# EAGLE board FH9PHI2ICD7FAOS (EAGLE 9.6.2)
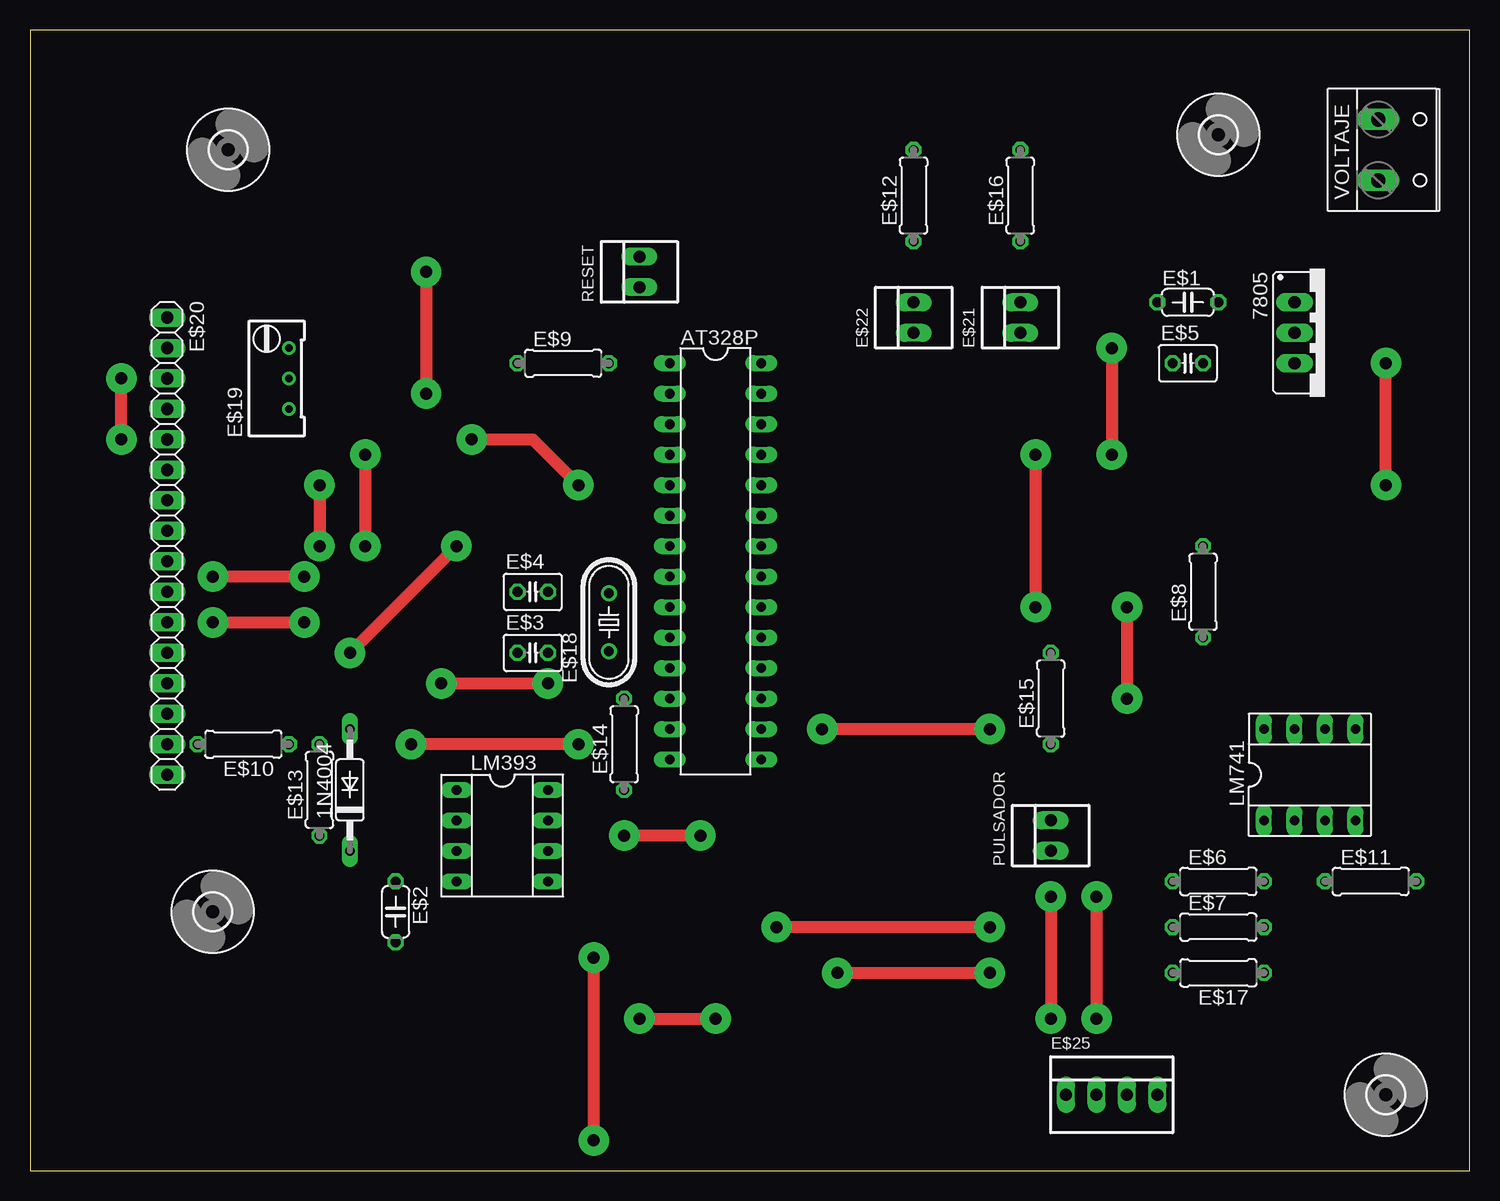
[diagram p0: board, top side]
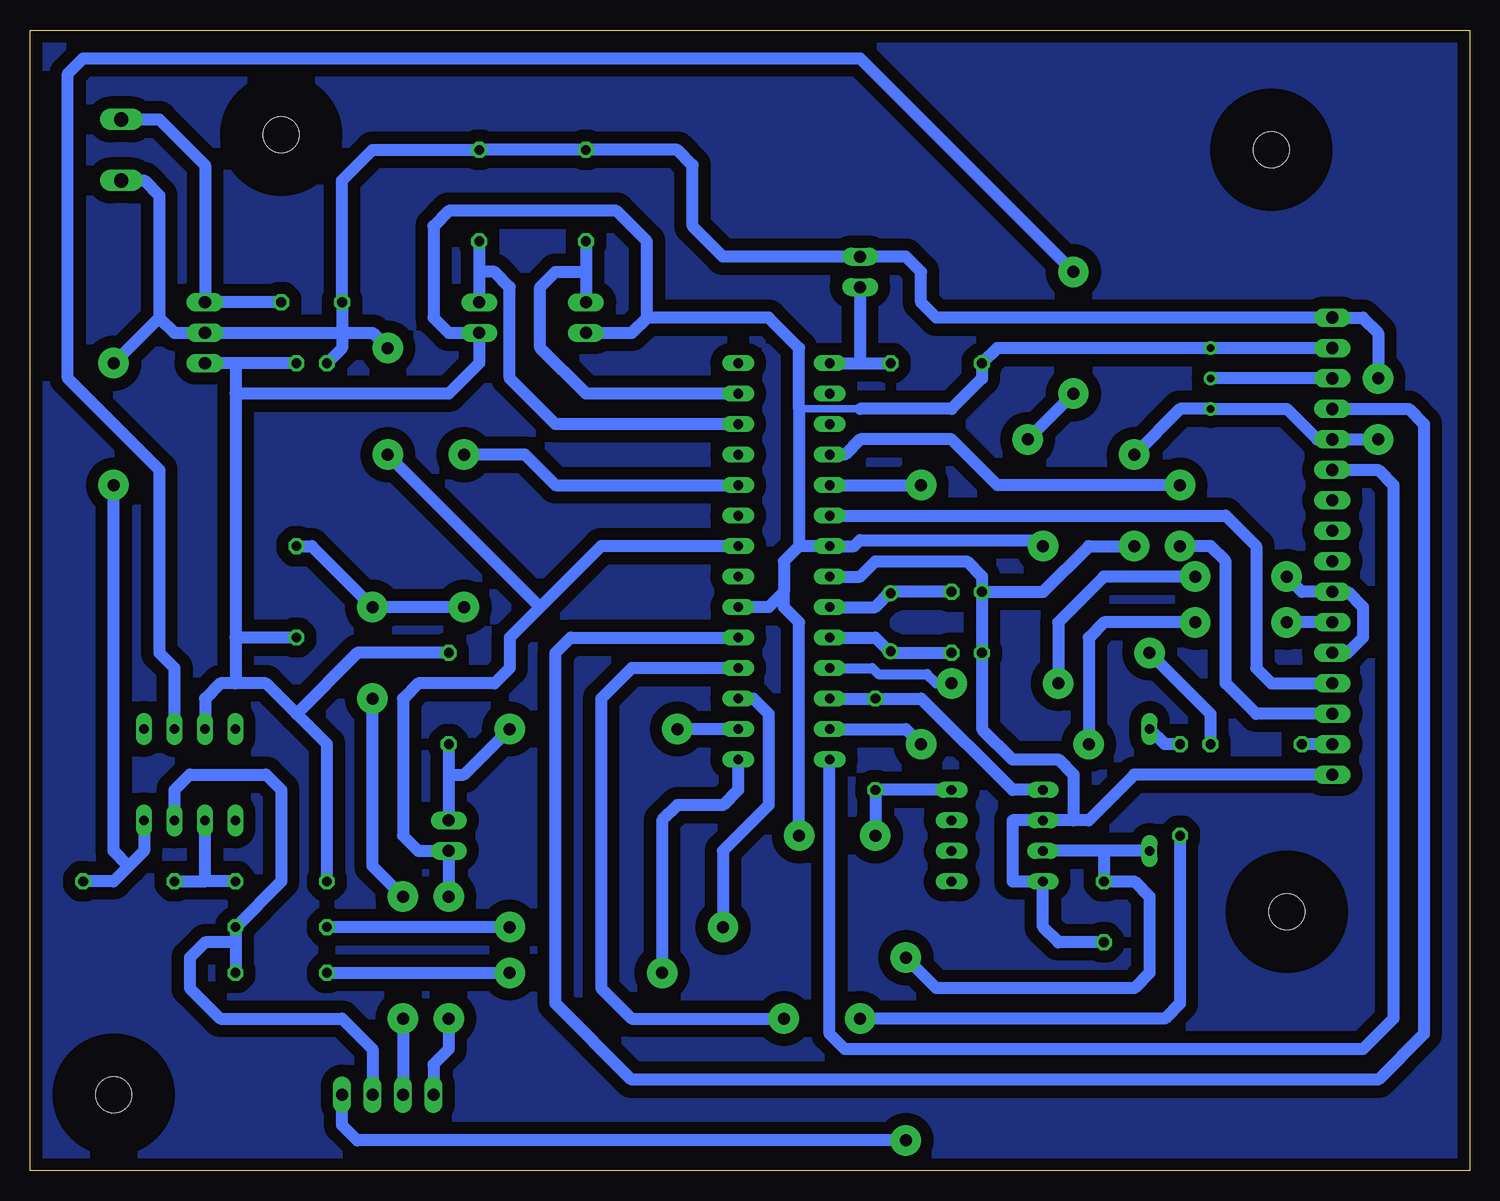
[diagram p1: board, bottom side, seen from below]

Size 120 x 95.08 mm. Coordinates in mm from the lower left corner, seen from the top.
Outline: 0,0 120,0 120,95.08 0,95.08 0,0
Copper layers (1*16): Top 0.035mm / dielectric 1.5mm / Bottom 0.035mm
Design rules "default": minimum track width 10mil, minimum drill 24mil, track to track 8mil, track to pad 8mil, pad to pad 8mil, via to via 8mil, smd to smd 8mil, copper to edge 40mil, drill to drill 8mil, minimum pad ring 10mil, minimum via ring 8mil, stop-mask expansion 4mil, vias tented up to drill 0mil, thermal gap 10mil

## Footprints (pad centres in the part's own frame; a part is rotated, then mirrored left to right if it is on the bottom)
C2992 = drill 0.813 long: A 5.08,0; C -5.08,0
78XXS = drill 1.016 long: GND 0,-2.54; IN -2.54,-2.54; OUT 2.54,-2.54
DIL28-3 = drill 0.813 long: 1 -16.51,-3.81; 2 -13.97,-3.81; 3 -11.43,-3.81; 4 -8.89,-3.81; 5 -6.35,-3.81; 6 -3.81,-3.81; 7 -1.27,-3.81; 8 1.27,-3.81; 9 3.81,-3.81; 10 6.35,-3.81; 11 8.89,-3.81; 12 11.43,-3.81; 13 13.97,-3.81; 14 16.51,-3.81; 15 16.51,3.81; 16 13.97,3.81; 17 11.43,3.81; 18 8.89,3.81; 19 6.35,3.81; 20 3.81,3.81; 21 1.27,3.81; 22 -1.27,3.81; 23 -3.81,3.81; 24 -6.35,3.81; 25 -8.89,3.81; 26 -11.43,3.81; 27 -13.97,3.81; 28 -16.51,3.81
C050-024X044 = drill 0.813 octagon: 1 -2.54,0; 2 2.54,0
C025-030X050 = drill 0.813 octagon: 1 -1.27,0; 2 1.27,0
0207/7 = drill 0.813 octagon: 1 -3.81,0; 2 3.81,0
HC49/S = drill 0.813: 1 -2.413,0; 2 2.413,0
RTRIM64W = drill 0.61: 1 1.27,-2.54; 2 1.27,0; 3 1.27,2.54
1X16 = drill 1.016 long: 1 -19.05,0; 2 -16.51,0; 3 -13.97,0; 4 -11.43,0; 5 -8.89,0; 6 -6.35,0; 7 -3.81,0; 8 -1.27,0; 9 1.27,0; 10 3.81,0; 11 6.35,0; 12 8.89,0; 13 11.43,0; 14 13.97,0; 15 16.51,0; 16 19.05,0
22-23-2021 = drill 1 long: 1 -1.27,0; 2 1.27,0
3,0 = hole 3: 0,0
22-23-2041 = drill 1 long: 1 -3.81,0; 2 -1.27,0; 3 1.27,0; 4 3.81,0
SOCKET-08 = drill 0.813 long: 1 -3.81,-3.81; 2 -1.27,-3.81; 3 1.27,-3.81; 4 3.81,-3.81; 5 3.81,3.81; 6 1.27,3.81; 7 -1.27,3.81; 8 -3.81,3.81
W237-132 = drill 1.194 long: 1 -2.54,-0.635; 2 2.54,-0.635

## Placement (x,y rotation side)
1N4004  [C2992]  26.67,31.75 90 top
7805  [78XXS]  107.95,69.85 270 top
AT328P  [DIL28-3]  57.15,50.8 270 top
E$1  0.33uF  [C050-024X044]  96.52,72.39 0 top
E$2  1uF  [C050-024X044]  30.48,21.59 270 top
E$3  22pF  [C025-030X050]  41.91,43.18 0 top
E$4  22pF  [C025-030X050]  41.91,48.26 0 top
E$5  100nF  [C025-030X050]  96.52,67.31 0 top
E$6  10k  [0207/7]  99.06,24.13 0 top
E$7  1M  [0207/7]  99.06,20.32 0 top
E$8  10k  [0207/7]  97.79,48.26 90 top
E$9  10k  [0207/7]  44.45,67.31 0 top
E$10  220  [0207/7]  17.78,35.56 180 top
E$11  10k  [0207/7]  111.76,24.13 0 top
E$12  10k  [0207/7]  73.66,81.28 90 top
E$13  150  [0207/7]  24.13,31.75 90 top
E$14  330  [0207/7]  49.53,35.56 90 top
E$15  10k  [0207/7]  85.09,39.37 90 top
E$16  10k  [0207/7]  82.55,81.28 90 top
E$17  220  [0207/7]  99.06,16.51 180 top
E$18  16Mhz  [HC49/S]  48.26,45.72 90 top
E$19  10k  [RTRIM64W]  20.32,66.04 0 top
E$20  [1X16]  11.43,52.07 270 top
E$21  [22-23-2021]  82.55,71.12 90 top
E$22  [22-23-2021]  73.66,71.12 90 top
E$23  [3,0]  15.24,21.59 0 top
E$24  [3,0]  16.51,85.09 0 top
E$25  [22-23-2041]  90.17,6.35 0 top
E$26  [3,0]  113.03,6.35 0 top
E$27  [3,0]  99.06,86.36 0 top
LM393  [SOCKET-08]  39.37,27.94 270 top
LM741  [SOCKET-08]  106.68,33.02 0 top
PULSADOR  [22-23-2021]  85.09,27.94 90 top
RESET  [22-23-2021]  50.8,74.93 90 top
VOLTAJE  [W237-132]  113.03,85.09 270 top

## Library data of the parts
1N4004 = diode
7805 = v-reg
AT328P = 40xx
E$1-E$17 E$19 = rcl
E$18 = crystal
E$20 = pinhead
E$21 E$22 E$25 PULSADOR RESET = con-molex
E$23 E$24 E$26 E$27 = holes
LM393 LM741 = ic-package
VOLTAJE = con-wago-508

## Nets
S$1: AT328P.10 E$3.2
S$2: AT328P.9 E$4.2
S$4: AT328P.1 E$9.2 RESET.1
S$5: AT328P.11 E$20.12
S$6: 1N4004.C E$2.1 E$25.4 LM393.3
S$7: AT328P.18 E$13.1
S$8: AT328P.12 LM393.1
S$9: 1N4004.A E$13.2
S$10: AT328P.16 E$15.1 PULSADOR.2
S$11: E$19.2 E$20.3
S$12: AT328P.19 E$20.4
S$13: E$10.2 E$20.15
S$14: AT328P.14 E$20.6
S$15: AT328P.6 E$20.13
S$16: AT328P.4 E$20.14
S$17: E$6.2 E$11.1 LM741.2
S$18: AT328P.24 E$8.2 E$25.2
S$19: AT328P.13 E$20.11
S$20: E$17.1 E$25.3 LM741.3
S$21: AT328P.27 E$12.1 E$22.2
S$22: AT328P.8 E$2.2 E$3.1 E$4.1 E$20.16 LM393.2 LM393.4
S$23: AT328P.26 E$16.1 E$21.2
S$24: 7805.OUT AT328P.7 AT328P.20 E$5.2 E$6.1 E$8.1 E$9.1 E$14.1 E$15.2 E$19.3 E$20.2 E$21.1 E$22.1 LM393.8 LM741.7
S$26: 7805.GND AT328P.22 E$1.1 E$5.1 E$11.2 E$12.2 E$16.2 E$19.1 E$20.1 E$20.5 E$25.1 LM741.4 PULSADOR.1 RESET.2
S$27: E$10.1
S$28: AT328P.15 E$17.2
S$29: AT328P.5 LM741.6
S$31: AT328P.17 E$7.1
S$34: 7805.IN E$1.2

## Tracks (layer width: path | path; a pad name or v marks a point on that pad's centre or on a via)
S$1
  Bottom 1.016: AT328P.10 49.53,44.45 48.26,43.18 E$3.2
S$2
  Bottom 1.016: AT328P.9 49.53,46.99 48.26,48.26 E$4.2
S$3
  pour Bottom (isolate 1.016): 0,95.25 120.65,95.25 120.65,0 0,0
S$4
  Bottom 1.016: AT328P.1 50.8,67.31 | 50.8,67.31 E$9.2 | RESET.1 50.8,67.31
S$5  (via drill 1 pad 2.54)
  Top 1.016: v22.86,49.53 v15.24,49.53 | v34.29,40.64 v43.18,40.64
  Bottom 0.813: AT328P.11 49.78,41.91 49.28,41.4 45.21,41.4 44.45,40.64 v43.18,40.64
  Bottom 1.016: v22.86,49.53 30.48,49.53 34.29,45.72 v34.29,40.64 | v15.24,49.53 13.97,48.26 10.16,48.26 8.89,46.99 8.89,44.45 10.16,43.18 E$20.12
S$6  (via drill 1 pad 2.54)
  Top 1.016: v46.99,17.78 v46.99,2.54
  Bottom 1.016: 1N4004.C 30.48,26.67 | 30.48,26.67 LM393.3 | 30.48,26.67 E$2.1 27.94,24.13 26.67,22.86 26.67,16.51 27.94,15.24 44.45,15.24 v46.99,17.78 | v46.99,2.54 92.71,2.54 93.98,3.81 E$25.4
S$7  (via drill 1 pad 2.54)
  Top 1.016: v50.8,12.7 v57.15,12.7
  Bottom 1.016: AT328P.18 69.85,41.91 72.39,39.37 72.39,15.24 69.85,12.7 v57.15,12.7 | v50.8,12.7 25.4,12.7 24.13,13.97 E$13.1
S$8
  Bottom 1.016: LM393.1 38.1,31.75 45.72,39.37 AT328P.12
S$9
  Bottom 1.016: E$13.2 25.4,35.56 1N4004.A
S$10  (via drill 1 pad 2.54)
  Top 1.016: v80.01,36.83 v66.04,36.83
  Bottom 1.016: E$15.1 85.09,33.02 | 85.09,33.02 PULSADOR.2 | 85.09,33.02 83.82,33.02 v80.01,36.83 | AT328P.16 v66.04,36.83
S$11
  Bottom 1.016: E$20.3 E$19.2
S$12
  Bottom 1.016: E$20.4 5.08,63.5 3.81,62.23 3.81,11.43 7.62,7.62 69.85,7.62 76.2,13.97 76.2,43.18 74.93,44.45 AT328P.19
S$13
  Bottom 1.016: E$20.15 E$10.2
S$14
  Bottom 1.016: E$20.6 7.62,58.42 6.35,57.15 6.35,12.7 8.89,10.16 52.07,10.16 53.34,11.43 AT328P.14
S$15
  Bottom 1.016: AT328P.6 20.32,54.61 17.78,52.07 17.78,41.91 16.51,40.64 E$20.13
S$16  (via drill 1 pad 2.54)
  Top 1.016: v24.13,57.15 v24.13,52.07
  Bottom 1.016: AT328P.4 52.07,59.69 50.8,60.96 43.18,60.96 39.37,57.15 v24.13,57.15 | v24.13,52.07 21.59,52.07 20.32,50.8 20.32,40.64 17.78,38.1 E$20.14
S$17
  Bottom 1.016: E$6.2 105.41,24.13 | 105.41,24.13 LM741.2 | E$11.1 105.41,24.13
S$18  (via drill 1 pad 2.54)
  Top 1.016: v83.82,59.69 v83.82,46.99 | v88.9,22.86 v88.9,12.7 | v91.44,46.99 v91.44,39.37
  Bottom 1.016: v83.82,59.69 78.74,59.69 76.2,57.15 AT328P.24 | E$8.2 96.52,52.07 v91.44,46.99 v83.82,46.99 | v88.9,12.7 E$25.2 | v88.9,22.86 91.44,25.4 v91.44,39.37
S$19  (via drill 1 pad 2.54)
  Top 1.016: v45.72,35.56 v31.75,35.56 | v15.24,45.72 v22.86,45.72
  Bottom 1.016: E$20.11 v15.24,45.72 | v22.86,45.72 30.48,45.72 31.75,44.45 v31.75,35.56 | AT328P.13 46.99,36.83 v45.72,35.56
S$20
  Bottom 1.016: LM741.3 107.95,31.75 106.68,33.02 100.33,33.02 99.06,31.75 99.06,24.13 102.87,20.32 102.87,19.05 | 102.87,19.05 E$17.1 | 102.87,19.05 105.41,19.05 106.68,17.78 106.68,15.24 104.14,12.7 93.98,12.7 91.44,10.16 E$25.3
S$21
  Bottom 1.016: E$12.1 73.66,74.93 | 73.66,74.93 E$22.2 | 73.66,74.93 76.2,74.93 77.47,73.66 77.47,68.58 73.66,64.77 AT328P.27
S$22
  Bottom 1.016: AT328P.8 50.8,49.53 49.53,50.8 41.91,50.8 40.64,49.53 E$4.1 | E$4.1 E$3.1 40.64,36.83 38.1,34.29 34.29,34.29 33.02,33.02 33.02,29.21 | E$20.16 27.94,33.02 31.75,29.21 33.02,29.21 | E$2.2 34.29,19.05 35.56,20.32 LM393.4 38.1,24.13 38.1,29.21 LM393.2 33.02,29.21 | E$4.1 35.56,48.26 31.75,52.07 27.94,52.07
S$23
  Bottom 1.016: E$16.1 82.55,74.93 | 82.55,74.93 E$21.2 | 82.55,74.93 81.28,74.93 80.01,73.66 80.01,66.04 76.2,62.23 AT328P.26
S$24  (via drill 1 pad 2.54)
  Top 1.016: v55.88,27.94 v49.53,27.94
  Bottom 0.61: 50.8,63.5 55.88,63.5
  Bottom 1.016: E$20.2 E$19.3 39.37,68.58 E$9.1 40.64,66.04 43.18,63.5 50.8,63.5 | v55.88,27.94 55.88,45.72 57.15,46.99 57.15,48.26 | 35.69,52.2 36.07,52.58 50.8,52.58 51.31,52.07 AT328P.7 55.88,52.07 | 55.88,52.07 57.15,50.8 57.15,48.26 | 57.15,48.26 58.42,46.99 AT328P.20 | LM393.8 E$14.1 v49.53,27.94 | 55.88,52.07 55.88,63.5 55.88,68.58 58.42,71.12 68.58,71.12 | E$22.1 69.85,69.85 68.58,71.12 | 68.58,71.12 68.58,77.47 71.12,80.01 85.09,80.01 86.36,78.74 86.36,71.12 85.09,69.85 E$21.1 82.55,67.31 85.09,64.77 102.87,64.77 | E$5.2 102.87,67.31 | 102.87,67.31 7805.OUT | E$6.1 95.25,35.56 97.79,38.1 | 97.79,38.1 100.33,40.64 102.87,40.64 | 102.87,40.64 104.14,40.64 105.41,39.37 LM741.7 | E$15.2 92.71,43.18 97.79,38.1 | 102.87,67.31 102.87,64.77 | 102.87,64.77 102.87,44.45 | 102.87,44.45 102.87,40.64 | E$8.1 102.87,44.45
S$26  (via drill 1 pad 2.54)
  Top 1.016: v27.94,59.69 v27.94,52.07 | v7.62,60.96 v7.62,66.04 | v90.17,68.58 v90.17,59.69 | v113.03,57.15 v113.03,67.31 | v85.09,22.86 v85.09,12.7
  Bottom 1.016: LM741.4 110.49,26.67 111.76,25.4 | 111.76,25.4 113.03,24.13 E$11.2 | 111.76,25.4 113.03,26.67 v113.03,57.15 | 113.03,82.55 110.49,82.55 109.22,81.28 109.22,71.12 | 109.22,71.12 107.95,69.85 7805.GND 93.98,69.85 | 93.98,69.85 E$1.1 93.98,82.55 91.44,85.09 E$16.2 E$12.2 66.04,85.09 64.77,83.82 64.77,78.74 62.23,76.2 RESET.2 46.99,76.2 45.72,74.93 45.72,72.39 44.45,71.12 E$20.1 8.89,71.12 7.62,69.85 v7.62,66.04 | 93.98,69.85 93.98,68.58 E$5.1 | v27.94,59.69 24.13,63.5 E$19.1 15.24,63.5 12.7,60.96 E$20.5 v7.62,60.96 | 93.98,69.85 91.44,69.85 v90.17,68.58 | AT328P.22 72.39,52.07 77.47,46.99 | 77.47,46.99 80.01,44.45 80.01,41.91 81.28,40.64 87.63,40.64 88.9,39.37 88.9,27.94 87.63,26.67 PULSADOR.1 v85.09,22.86 | 77.47,46.99 v90.17,59.69 | v113.03,67.31 109.22,71.12 | v85.09,12.7 85.09,10.16 86.36,8.89 E$25.1
S$27  (via drill 1 pad 2.54)
  Top 1.016: v35.56,52.07 v26.67,43.18
  Bottom 1.016: v26.67,43.18 21.59,38.1 E$10.1
S$28  (via drill 1 pad 2.54)
  Top 1.016: v67.31,16.51 v80.01,16.51
  Bottom 1.016: AT328P.15 60.96,31.75 62.23,30.48 66.04,30.48 67.31,29.21 v67.31,16.51 | E$17.2 v80.01,16.51
S$29  (via drill 1 pad 2.54)
  Top 1.016: v36.83,60.96 41.91,60.96 v45.72,57.15 | v33.02,74.93 v33.02,64.77
  Bottom 1.016: LM741.6 107.95,41.91 109.22,43.18 109.22,58.42 116.84,66.04 116.84,91.44 115.57,92.71 50.8,92.71 v33.02,74.93 | AT328P.5 v45.72,57.15 | v36.83,60.96 v33.02,64.77
S$31  (via drill 1 pad 2.54)
  Top 1.016: v80.01,20.32 v62.23,20.32
  Bottom 1.016: AT328P.17 59.69,39.37 58.42,38.1 58.42,30.48 62.23,26.67 v62.23,20.32 | v80.01,20.32 E$7.1
S$34
  Bottom 1.016: 111.76,87.63 109.22,87.63 105.41,83.82 7805.IN E$1.2